# Altium PCB PCB1.PcbDoc
Units mm, origin at the board's own origin, x right, y up, seen from the top; angles counter-clockwise.
Board outline 73.66 x 122.05 mm, 2 copper layers (Top Layer, Bottom Layer); 28 components, 32 nets, 121 pads, 0 vias.
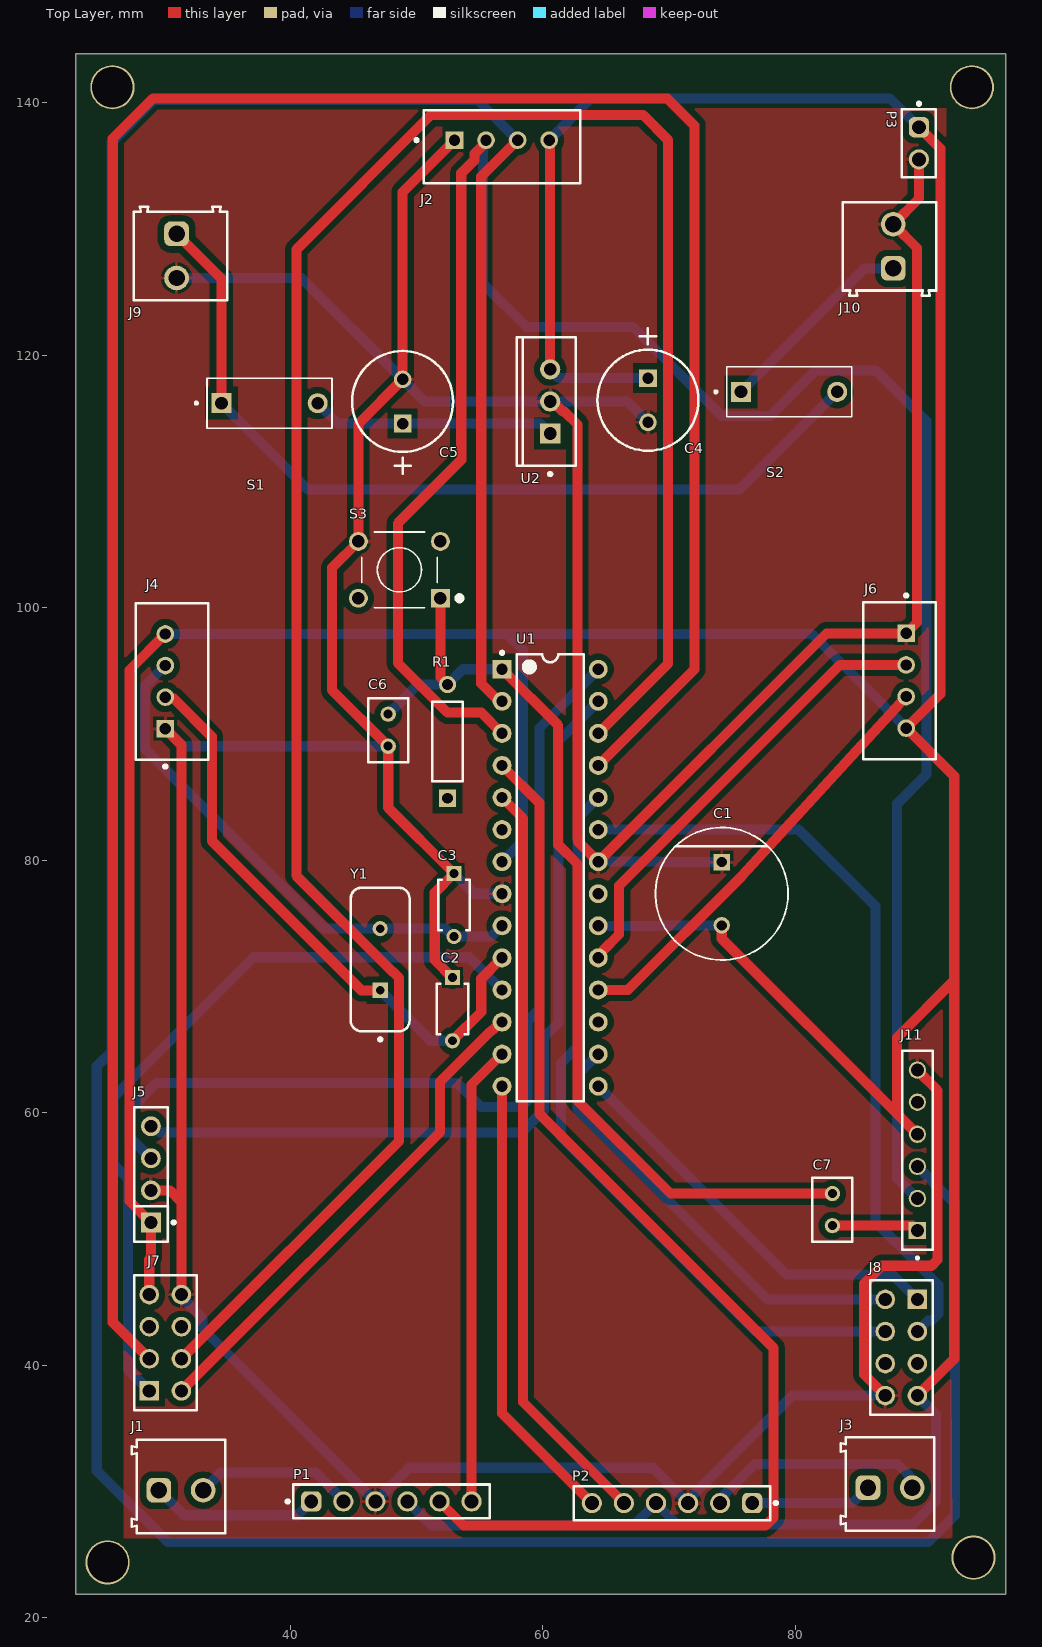
[diagram p0: Top Layer view]
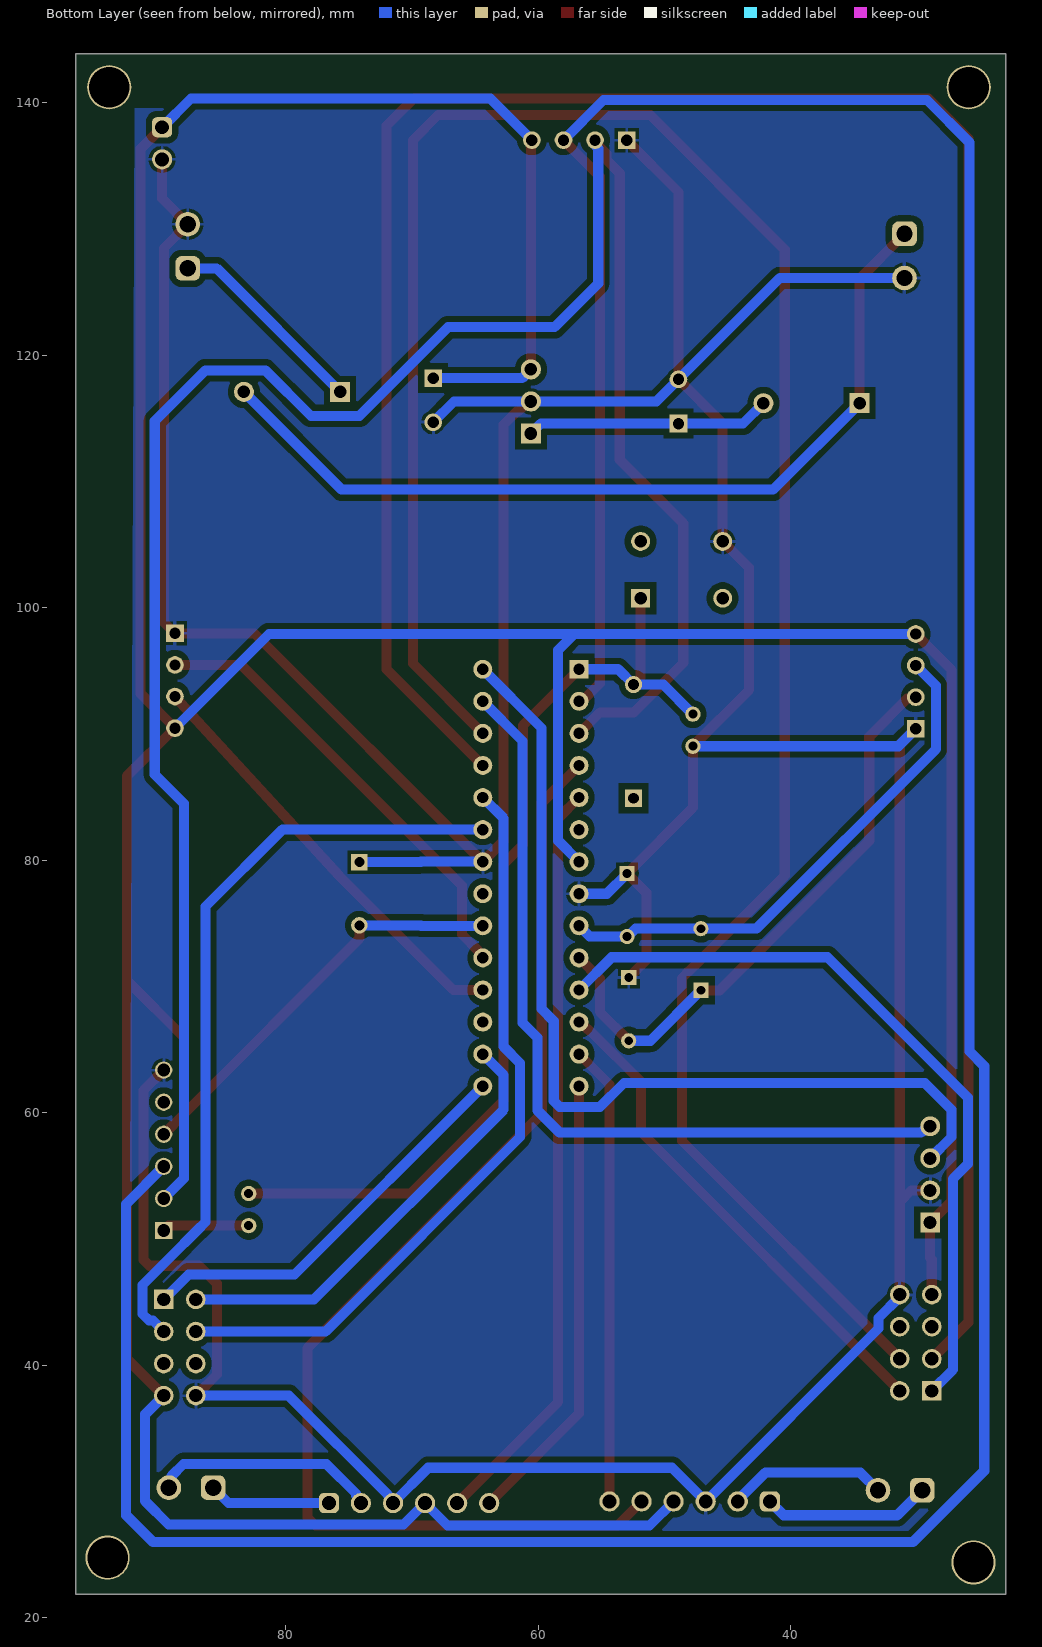
[diagram p1: Bottom Layer view, seen from below]
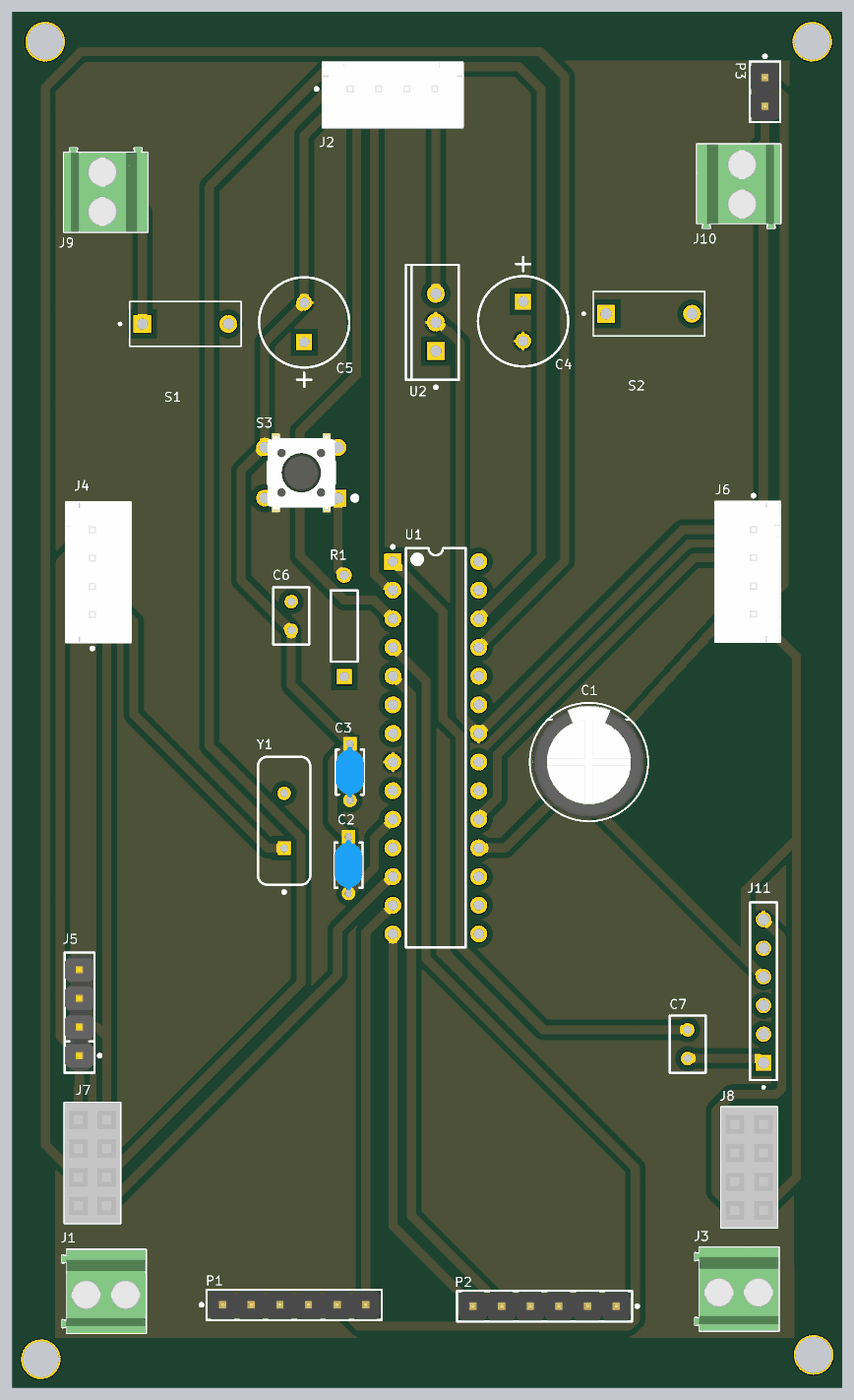
[diagram p2: 3D render of the assembled board from above, using the file's embedded part models]

## Layer stack, top to bottom
Top Solder: solder mask 0.0102, Solder Resist, Dk 3.5
Top Layer: signal copper 0.0356
Dielectric 1: dielectric 0.32, FR-4, Dk 4.8
Bottom Layer: signal copper 0.0356
Bottom Solder: solder mask 0.0102, Solder Resist, Dk 3.5

## Board outline
22.987,21.844 96.647,21.844 96.647,143.891 22.987,143.891

## Design rules (kind name [scope] priority, off if disabled: settings)
Clearance [All] p1: gap=0.5 ignorepadtopadclearanceinfootprint=FALSE
PolygonConnect [All] p1: connectstyle=Relief reliefconductorwidth=0.254 reliefentries=4 polygonreliefangle="90 Angle" airgapwidth=0.254
RoutingVias [All] p1: holewidth=0.711 width=1.27 viastyle="Through Hole" minholewidth=0.711 minwidth=1.27 maxholewidth=0.711 maxwidth=1.27
SolderMaskExpansion [All] p1: expansion=0.102 istentingtop=FALSE
Width [All] p1: maxlimit=1 minlimit=0.8 preferedwidth=0.8
30 further rules are at their usual default settings.

## Components (designator, comment, footprint, x,y, rotation, side; value= is the part's Value field where it differs from the comment)
C1 "EEUED2G100" FP-RAD-TH-D_10_0_5-L_20_2-MFG 74.168,77.343 r270 top
C2 "RDE5C2A220J0M1H03A" FP-RDE0M1-MFG 52.832,68.199 r270 top
C3 "RDE5C2A220J0M1H03A" FP-RDE0M1-MFG 52.959,76.454 r270 top
C4 "ECA-2AM470" CAPPR65-350-1150X800X1250 68.326,116.431 r270 top
C5 "ECA-2AM470" CAPPR65-350-1150X800X1250 48.895,116.332 r90 top
C6 "C320C104M5U5TA" C320C 40.752,97.297 r90 top value=100nF
C7 "C320C104M5U5TA" C320C 75.931,59.324 r90 top value=100nF
J1 "691214110002" 691214110002 31.341,30.399 r0 top
J2 "Ultrasonic 1" FP-B4B-XH-A_LF_SN-MFG 56.749,136.508 r180 top
J3 "691214110002" 691214110002 87.503,30.607 r0 top
J4 "Ultrasonic 2" FP-B4B-XH-A_LF_SN-MFG 30.624,94.167 r270 top
J5 "MPU6050" FP-M20-9990445-MFG 28.956,55.118 r90 top
J6 "Ultrasonic 3" FP-B4B-XH-A_LF_SN-MFG 88.248,94.214 r90 top
J7 "Motor Driver 1" SMTC-SSW-104-02-X-D 28.829,37.973 r90 top
J8 "Motor Driver 2" SMTC-SSW-104-02-X-D 89.662,45.212 r270 top
J9 "691214110002" 691214110002 31.288,127.861 r270 top
J10 "691214110002" 691214110002 87.457,128.623 r90 top
J11 "ESQ-106-59-G-S" SAMTEC_ESQ-106-59-G-S 89.662,50.673 r90 top
P1 "Motor 1" 61300611121 48.006,29.21 r0 top
P2 "Motor 2" 61300611121 70.231,29.083 r180 top
P3 "61300211121" 61300211121 89.789,136.779 r270 top
R1 "MFR-25FBF52-1K" RESA60-630X240 52.451,89.408 r90 top
S1 "DS01-254-L-01BE" SW_DS01-254-L-01BE 38.354,116.2 r270 top
S2 "DS01-254-L-01BE" SW_DS01-254-L-01BE 79.502,117.094 r270 top
S3 "FSM8JH" SW_FSM8JH 48.641,102.997 r180 top
U1 "ATmega328P-PU" 28P3 60.579,78.613 r0 top
U2 "LM7805ACT" FAIR-TO-220-3 60.579,116.332 r180 top
Y1 "FOXSLF/160-20" FOX-FOXSLF160-20 47.117,72.136 r90 top

## Footprints (in the part's own frame and the unit in brackets; to place one, negate y for a bottom-side part, rotate by r counter-clockwise, add the part's x,y. Pads: shape width x height; smd on the part's side, far side on the other; paste and mask are expansions set on the pad)
28P3 [mm] "28-Pin Plastic Dual In-Line Package (PDIP)"
  rect 1.5x1.5 hole 0.9: 1(-3.81,16.51)
  round 1.5 hole 0.9: 2(-3.81,13.97) 3(-3.81,11.43) 4(-3.81,8.89) 5(-3.81,6.35) 6(-3.81,3.81) 7(-3.81,1.27) 8(-3.81,-1.27) 9(-3.81,-3.81) 10(-3.81,-6.35) 11(-3.81,-8.89) 12(-3.81,-11.43) 13(-3.81,-13.97) 14(-3.81,-16.51) 15(3.81,-16.51) 16(3.81,-13.97) 17(3.81,-11.43) 18(3.81,-8.89) 19(3.81,-6.35) 20(3.81,-3.81) 21(3.81,-1.27) 22(3.81,1.27) 23(3.81,3.81) 24(3.81,6.35) 25(3.81,8.89) 26(3.81,11.43) 27(3.81,13.97) 28(3.81,16.51)
  silkscreen extent -3.93,-17.7 2.65,17.93, body extent -3.6,-17.65 3.6,17.65, height 4.58
61300211121 [mm] "Pin Header, pitch 2.54 mm, THT, Vertical, single row, 2p"
  rrect50% 1.6x1.6 hole 1.1: 1(-1.27,0)
  round 1.6 hole 1.1: 2(1.27,0)
  silkscreen extent -3.26,-1.34 2.69,1.34, body extent -2.54,-1.27 2.54,1.27, height 8.57
61300611121 [mm] "Pin Header, pitch 2.54 mm, THT, Vertical, single row, 6p"
  rrect50% 1.6x1.6 hole 1.1: 1(-6.35,0)
  round 1.6 hole 1.1: 2(-3.81,0) 3(-1.27,0) 4(1.27,0) 5(3.81,0) 6(6.35,0)
  silkscreen extent -8.34,-1.34 7.77,1.34, body extent -7.62,-1.27 7.62,1.27, height 8.57
691214110002 [mm] "3.50 mm Horizontal Entry Modular, 2p"
  rrect50% 1.95x1.95 hole 1.3: 1(-1.75,-0.3)
  round 1.95 hole 1.3: 2(1.75,-0.3)
  silkscreen extent -3.9,-3.7 3.5,3.7, body extent -3.95,-3.7 3.5,3.7, height 8.55
C320C [mm]
  round 1.21 hole 0.71: 1(-8.27,-7) 2(-5.73,-7)
  silkscreen extent -9.54,-8.59 -4.46,-5.41
CAPPR65-350-1150X800X1250 [mm] "THD, 2-Leads, Dia 8mm, Body 11.5mm"
  rect 1.4x1.4 hole 0.9: 1(-1.75,0)
  round 1.4 hole 0.9: 2(1.75,0)
  silkscreen extent -5.71,-4 4,4, body extent -4,-4 4,4, height 12.5
FAIR-TO-220-3 [mm] "FM, 3-Leads, Body 10.2x4.7mm, Pitch 2.54mm"
  rect 1.6x1.6 hole 1: 1(0,2.54)
  round 1.6 hole 1: 2(0,0) 3(0,-2.54)
  silkscreen extent -2.04,-5.1 2.66,5.87, body extent -2.04,-5.1 2.66,5.1, height 18.95
FOX-FOXSLF160-20 [mm] "THD, 2-Leads, Body 11.35x4.65mm"
  rect 1.2x1.2 hole 0.7: 1(-2.44,0)
  round 1.2 hole 0.7: 2(2.44,0)
  silkscreen extent -6.45,-2.33 5.68,2.33, body extent -5.67,-2.32 5.68,2.33, height 3.6
FP-B4B-XH-A_LF_SN-MFG [mm]
  rect 1.4x1.4 hole 0.9 paste-2539.97 mask+0: 1(3.75,-0.525)
  round 1.4 hole 0.9 paste-2539.97 mask+0: 2(1.25,-0.525) 3(-1.25,-0.525) 4(-3.75,-0.525)
  silkscreen extent -6.2,-2.88 6.87,2.87, body extent -6.3,-2.98 6.3,2.98, height 0.25
FP-M20-9990445-MFG [mm]
  rect 1.57x1.57 hole 1.02 paste-2539.97 mask+0: 1(-3.81,0)
  round 1.57 hole 1.02 paste-2539.97 mask+0: 2(-1.27,0) 3(1.27,0) 4(3.81,0)
  silkscreen extent -5.33,-1.92 5.33,1.32, body extent -5.43,-1.42 5.43,1.42, height 0.25
FP-RAD-TH-D_10_0_5-L_20_2-MFG [mm]
  rect 1.3x1.3 hole 0.8 paste-2539.97 mask+0: 1(-2.5,0)
  round 1.3 hole 0.8 paste-2539.97 mask+0: 2(2.5,0)
  silkscreen extent -5.25,-5.25 5.25,5.25, body extent -5.35,-5.35 5.35,5.35, height 0.25
FP-RDE0M1-MFG [mm]
  rect 1.2x1.2 hole 0.7 paste-2539.97 mask+0: 1(-2.5,0)
  round 1.2 hole 0.7 paste-2539.97 mask+0: 2(2.5,0)
  silkscreen extent -2,-1.25 2,1.25, body extent -3.2,-1.35 3.2,1.35, height 0.25
RESA60-630X240 [mm] "Axial Resistor, 2-Leads, Dia 2.4mm, Body Length 6.3mm"
  rect 1.35x1.35 hole 0.85: 1(-4.5,0)
  round 1.35 hole 0.85: 2(4.5,0)
  silkscreen extent -3.15,-1.2 3.15,1.2, body extent -3.15,-1.2 3.15,1.2, height 2.4
SAMTEC_ESQ-106-59-G-S [mm]
  rect 1.37x1.37 hole 1.02: 01(0,0)
  round 1.37 hole 1.02: 02(2.54,0) 03(5.08,0) 04(7.62,0) 05(10.16,0) 06(12.7,0)
  silkscreen extent -2.27,-1.2 14.23,1.2
SMTC-SSW-104-02-X-D [mm] "SQ Post Socket, 2x4 Pins, Vertical, 2.54mm Pitch, Female"
  rect 1.55x1.55 hole 1.04: 1(0,0)
  round 1.55 hole 1.04: 2(0,-2.54) 3(2.54,0) 4(2.54,-2.54) 5(5.08,0) 6(5.08,-2.54) 7(7.62,0) 8(7.62,-2.54)
  silkscreen extent -1.53,-3.74 9.15,1.2, body extent -1.52,-3.75 9.14,1.21, height 8.51
SW_DS01-254-L-01BE [mm]
  rect 1.58x1.58 / inner round 1.58 / far side rect 1.58x1.58 hole 1: 1A(0,-3.81)
  round 1.58 hole 1: 1B(0,3.81)
  silkscreen extent -1.98,-5.9 1.98,4.95
SW_FSM8JH [mm]
  rect 1.498x1.498 / inner round 1.498 / far side rect 1.498x1.498 hole 0.99: 1(-3.25,2.25)
  round 1.498 hole 0.99: 2(-3.25,-2.25) 3(3.25,2.25) 4(3.25,-2.25)
  silkscreen extent -4.95,-3 3,3, body extent -3,-3.95 3,3.95, height 9.5

## Part data
C1: library part CMP-05427-001613-1, "Aluminum Electrolytic Capacitors (Radial Lead Type) 10uF ±20% 400V", Capacitance=10uF, Case/Package=Radial, Dielectric Material=Aluminium, Max Operating Temperature=105°C, Min Operating Temperature=-25°C, Package Quantity=200, Ripple Current=300mA, Tolerance=20%, Voltage=400V, Construction=RADIAL, Contact Plating=Tin, Diameter=10mm, Dissipation Factor=0.24%, Height=20mm, Height - Seated (Max)=0.787inch, Lead Diameter=0.6mm, Lead Free="Lead Free", Lead Pitch=5mm, Length=20mm, Life (Hours)=8000Hour, Mount="Through Hole", Number of Pins=2, Packaging=Bulk, Polarity=Polar, Radiation Hardening=No, REACH SVHC="No SVHC", Ripple Current (AC)=300mA, RoHS Compliant=Yes, Series=ED, Termination=Radial, Voltage Rating=400V, Voltage Rating (DC)=400V
C2 C3: library part CMP-06035-022985-1, "Ceramic Capacitor 22pF ±5% 100V C0G Radial", Capacitance=22pF, Case/Package=Radial, Dielectric=C0G, Max Operating Temperature=125°C, Min Operating Temperature=-55°C, Package Quantity=1, Resistor Type=Ceramic, Tolerance=5%, Voltage Rating=100V, Height=3.5mm, Height - Seated (Max)=0.236inch, Lead Diameter=0.5mm, Lead Free="Lead Free", Lead Pitch=0.197inch, Length=0.157inch, Mount="Through Hole", Packaging="Cut Tape", Termination=Radial, Voltage Rating (DC)=100V, Width=0.098inch
C4 C5: library part CMP-1665-00041-1, "Aluminum Electrolytic Capacitor, 47 uF, +/- 20%, 100 V, -40 to 85 degC, 2-Pin THD, RoHS, Bulk", Case\Package=QFN, Max Operating Temperature="70 degC", Min Operating Temperature="-20 degC", Nominal Supply Voltage="3.3 V", Package Quantity=500, ComponentLink1Description="Manufacturer URL", ComponentLink1URL=http://www.panasonic.com/, ComponentLink2Description=Datasheet, ComponentLink2URL=http://industrial.panasonic.com/cdbs/www-data/pdf/RDF0000/ABA0000C1047.pdf, Data Rate="54 mbps", DatasheetVersion=Mar-16, Length="7.7 mm", Mount="Surface Mount", PackageDescription="2-Pin Radial Lead, Dia 8 mm, Body Length 11.5 mm", PackageReference=CAPPR65-350-1150X800X1250, Packaging="Tape and Reel", Pins=48, Radiation Hardening=No, RoHSCompliant=true
C6 C7: "0.1ÂµF Â±20% 50V Ceramic Capacitor Z5U Radial", Package="Radial KEMET", Availability=Unavailable, MF=KEMET, MP=C320C104M5U5TA, Price=None, SnapEDA_Link=https://www.snapeda.com/parts/C320C104M5U5TA/KEMET/view-part/228184/?ref=snap
J1 J3 J9 J10: library part CMP-1502-02464-2, Color="Blue, Green", Current=10A, Max Operating Temperature=105°C, Min Operating Temperature=-40°C, Voltage=300V, Contact Material=Brass, Contact Plating="Brass, Tin", Current Rating=10A, Height=8.7mm, Housing Material=Nylon, Lead Pitch=3.5mm, Length=7.4mm, Mount="Through Hole", NexarPartId=18818288, Number of Contacts=2, Number of Levels=1, Number of Pins=2, Number of Positions Per Level=2, Number of Rows=1, Packaging=Box, Pitch=3.5052mm, Plating="Brass, Steel", REACH SVHC=Unknown, RoHS=Compliant, Stripping Length=-6mm, Termination=Screw, Voltage Rating=300V, Width=7.9mm, Wire Gauge (Max)=24AWG, Wire Gauge (Min)=16AWG, Wire/Cable Gauge=24AWG
J2 J4 J6: library part CMP-17439-000250-1, "CONN HEADER VERT 4POS 2.5MM", Color=Natural, Contact Resistance=20mR, Current Rating=3A, Flammability Rating="UL94 V-0", Housing Color=White, Insulation Resistance=1GR, Max Operating Temperature=85°C, Max Voltage Rating (AC)=250V, Min Operating Temperature=-25°C, Package Quantity=500, Connector Type=Header, Contact Finish - Mating=TIN, Contact Material=Brass, Contact Plating=Tin, Contact Shape=Square, Contact Type="Male Pin", Depth=5.75mm, Fastening Type=Detent, Gender=Male, Housing Material=Polyamide, Insulation Color=Natural, Insulation Material=Nylon, Lead Free="Lead Free", Lead Pitch=2.5mm, Length=12.4mm, Mated Stacking Heights=9.8mm, Material=Polyamide, Max Current Rating=3A, Max Voltage Rating (DC)=250V, Mount="Through Hole", Number of Contacts=4, Number of Positions=4, Number of Rows=1, Orientation=Straight, Packaging=Bulk, Pitch=2.5mm, REACH SVHC="No SVHC", Series=XH, Termination=Solder, Voltage Rating=250V, Voltage Rating (AC)=250V, Wire/Cable Gauge=22AWG
J5: library part CMP-00671-05399696-1, "M20-9990445 Conn Unshrouded Header HDR 4 POS 2.54mm Solder ST Thru-Hole Bulk/Loose", Case/Package=SIL, Color=Black, Contact Resistance=25mΩ, Current Rating=3A, Insulation Resistance=10GΩ, Max Operating Temperature=105°C, Min Operating Temperature=-40°C, Voltage Rating (AC)=750V, Connector Type="Male Pin", Contact Material="Brass, Bronze, Gold, Nickel", Contact Mating Length=6.096mm, Contact Plating=Gold, Depth=2.54mm, Gender=Male, Height=2.54mm, Housing Color=Black, Housing Material=Nylon, Lead Pitch=2.54mm, Length=10.16mm, Max Current Rating=3A, Mount="Through Hole", NexarPartId=5399696, Number of Contacts=4, Number of Pins=4, Number of Positions=4, Number of Rows=1, Orientation=Straight, Pitch=2.54mm, Radiation Hardening=No, REACH SVHC="No SVHC", RoHS=Compliant, Termination=Solder, Voltage Rating (DC)=750V, Weight=45.359237g, Width=12.7mm
J7 J8: library part CMP-1023-00343-1, "SQ Post Socket, Through-hole, Vertical, -55 to 125 degC, 2.54mm Pitch, 8-Pin, Female, RoHS", Manufacturer=Samtec, PartNumber=SSW-104-02-G-D, Temperature Range="-55 to 125 degC", ComponentLink1Description="Manufacturer URL", ComponentLink1URL=http://www.samtec.com, ComponentLink2Description=Datasheet, ComponentLink2URL=http://www.samtec.com/documents/webfiles/pdf/SSW_TH.PDF, ComponentLink3Description="Package Specification", ComponentLink3URL=http://www.samtec.com/documents/webfiles/cpdf/SSW-1XX-XX-XXX-X-XX-XXX-XX-MKT.pdf, DatasheetVersion=F-214, Mounting Technology=Through-hole, Orientation=Vertical, PackageDescription="Assembly, Socket Strip .016 X .031 Tail", PackageReference=SSW-104-02-X-D, PackageVersion="CA, 6/1987", Pitch="2.54 mm", RoHS=True
J11: Package=None, Availability=Unavailable, MP=ESQ-106-59-G-S, Price=None
P1 P2: library part CMP-1502-01070-3, Color=Black, Contact Resistance=20mΩ, Current Rating=3A, Max Operating Temperature=105°C, Min Operating Temperature=-40°C, Operating Supply Voltage=250V, Connector Type="Male Pin", Contact Gender=Male, Contact Material=Copper, Contact Mating Length=5.9944mm, Contact Plating=Gold, Gender=Male, Height=8.89mm, Housing Material=PBT, Lead Free="Lead Free", Lead Pitch=2.54mm, Mount="Through Hole", NexarPartId=20084590, Number of Contacts=6, Number of Pins=6, Number of Positions=6, Number of Rows=1, Orientation=Vertical, Packaging=Bulk, Pitch=2.54mm, REACH SVHC=Unknown, RoHS=Compliant, Termination="Through Hole", Voltage Rating=250V
P3: library part CMP-1712-00002-6, Color=Black, Contact Resistance=20mΩ, Current Rating=3A, Max Operating Temperature=125°C, Min Operating Temperature=-40°C, Operating Supply Voltage=250V, Connector Type="Male Pin", Contact Gender=Male, Contact Material=Copper, Contact Mating Length=5.9944mm, Contact Plating=Gold, Gender=Male, Height=8.94mm, Housing Material=PBT, Lead Free="Lead Free", Lead Pitch=2.54mm, Mount="Through Hole", NexarPartId=20081794, Number of Contacts=2, Number of Pins=2, Number of Positions=2, Number of Rows=1, Orientation=Vertical, Packaging=Bulk, Pitch=2.54mm, REACH SVHC="No SVHC", RoHS=Compliant, Termination="Through Hole", Voltage Rating=250V
R1: library part CMP-1659-00075-1, "Axial Resistor, 1 KOhm, +/- 1%, 250 mW, -55 to 155 degC, 2-Pin THD, RoHS, Bulk", Case\Package=Axial, Max Operating Temperature="155 degC", Min Operating Temperature="-55 degC", Package Quantity=200, Power Rating="250 mW", Resistance="10 kohm", Tolerance=1%, Voltage Rating="250 V", ComponentLink1Description="Manufacturer URL", ComponentLink1URL=http://www.yageo.com/, ComponentLink2Description=Datasheet, ComponentLink2URL=http://www.yageo.com/documents/recent/Yageo%20LR_MFR_2013.pdf, DatasheetVersion=Apr-13, Length="0.248 inch", PackageDescription="2-Pin Axial Lead, Dia 2.4 mm, Body Length 6.3 mm", PackageReference=MFR-25, Packaging=Bulk, RoHSCompliant=true
S1 S2: "1 Position, Through Hole, 2.54 mm Pitch, Raised Slide Actuator, Flat Bottom, Long Pin, DIP Switch", Package=None, Availability="In Stock", Check_prices=https://www.snapeda.com/parts/DS01-254-L-01BE/CUI+Devices/view-part/?ref=eda, CUI_purchase_URL=https://www.cuidevices.com/product/switches/dip-switches/ds01-254-series?utm_source=snapeda.com&utm_medium=referral&utm_campaign=snapedaBOM, MF="CUI Devices", MP=DS01-254-L-01BE, Price=None, Purchase-URL=https://pricing.snapeda.com/search/part/DS01-254-L-01BE/?ref=eda, SnapEDA_Link=https://www.snapeda.com/parts/DS01-254-L-01BE/CUI+Devices/view-part/?ref=snap
S3: "Tactile Switch SPST-NO Top Actuated Through Hole", Package=None, Availability="In Stock", Check_prices=https://www.snapeda.com/parts/FSM8JH/TE+Connectivity+ALCOSWITCH+Switches/view-part/?ref=eda, MF="TE Connectivity", MP=FSM8JH, Price=None, SnapEDA_Link=https://www.snapeda.com/parts/FSM8JH/TE+Connectivity+ALCOSWITCH+Switches/view-part/?ref=snap
U1: library part CMP-0095-00013-2, "8-bit AVR Microcontroller, 32KB Flash, 1KB EEPROM, 2KB SRAM, 28-pin PDIP, Industrial Grade (-40°C to 85°C)", ComponentLink1Description="Manufacturer URL", ComponentLink1URL=http://www.atmel.com/, ComponentLink2Description="ATmega48A/48PA/88A/88PA/168A/168PA/328/328P Datasheet", ComponentLink2URL=http://www.atmel.com/dyn/resources/prod_documents/8271.pdf, ComponentLink3Description="ATmega48A/48PA/88A/88PA/168A/168PA/328/328P Summary", ComponentLink3URL=http://www.atmel.com/dyn/resources/prod_documents/8271S.pdf, DatasheetVersion="revD, May-2011", PackageDescription="28-lead (0.300\"/7.62mm Wide) Plastic Dual Inline Package (PDIP)", PackageReference=28P3, PackageVersion="revB, Sep-2001", RevisionNote="DatasheetVersion updated. URLs added."
U2: library part CMP-2000-04937-1, "Positive Voltage Regulator, 5 V, 1 A, 0 to 125 degC, 3-Pin TO-220, RoHS, Tube", Dropout Voltage Measurement Current=1A, Manufacturer=Fairchild, Maximum Input Voltage=35V, Maximum Operating Temperature=+125degC, Minimum Operating Temperature=0degC, Output Voltage=5V, Package Description="3-Pin Through Hole Device, Body 10 x 4.5 mm, Pitch 2.54 mm", Package Reference=TO-220, Quiescent Current=6mA, Typical Dropout Voltage @ Current=2V@1A, Datasheet URL=https://datasheet.ciiva.com/5816/1359194-5816420.pdf, Datasheet Version="Rev. 1.0.1, 05/2006", Dimensions=10.67x4.83x16.51mm, Height=16.51mm, Length=10.67mm, Line Regulation=50mV, Load Regulation=100mV, Manufacturer URL=https://www.fairchildsemi.com/, Maximum Output Current=1A, Mounting Type=ThroughHole, Number of Outputs=1, Output Type=Fixed, Package Type=TO-220, Package URL=https://www.fairchildsemi.com/package-drawings/TO/TO220B03.pdf, Pin Count=3, Polarity=Positive, Regulator Function=Linear, Series=LM78xx, Width=4.83mm
Y1: library part CMP-1749-00003-1, "Resistance Weld Thru-Hole Crystal, 16 MHz, -20 to 70 degC, 2-Pin THD, RoHS, Bulk", Case\Package=Axial, Max Operating Temperature="155 degC", Min Operating Temperature="-55 degC", Package Quantity=200, Power Rating="250 mW", Resistance="221 kohm", Tolerance=1%, Voltage Rating="250 V", ComponentLink1Description="Manufacturer URL", ComponentLink1URL=http://www.foxonline.com/, ComponentLink2Description=Datasheet, ComponentLink2URL=http://www.foxonline.com/pdfs/hc49slf.pdf, DatasheetVersion=Mar-15, Length="0.248 inch", Mount="Through Hole", PackageDescription="2-Pin Through Hole Device, Body 11.35 x 4.65 mm", PackageReference=FOXSLF160-20, Packaging=Bulk, RoHSCompliant=true

## Free pads (board coordinates)
  round 3.5 hole 3.2: 9(25.527,24.384) 9(25.908,141.224) 9(93.98,141.224) 9(94.107,24.765)

## Nets (pads, with @x,y where several pads share a name; then routed paths per layer and width w, separated by ;. In a path a pad name is that pad's centre, name@x,y a point inside that pad or via, vN(x,y) a via of type N, cw(c..) or ccw(c..) an arc to the next point about the centre after c; other vN are vias at no path point)
12V: J9.1 S1.1A S2.1B | length 69.7
  Top Layer w0.8: J9.1 34.544,126.055 S1.1A
  Bottom Layer w0.8: S1.1A 41.397,109.347 75.565,109.347 S2.1B
+5: R1.1
+5V: C1.2 C4.1 J2.4 J4.4 J5.1 J6.4 J7.7 J8.7 J11.04 P1.4 P2.4 P3.1 U1.7 U1.20 U2.3 | length 397.2
  Top Layer w0.8: J7.7 28.829,48.387 28.956,48.514 J5.1 27.254,53.01 27.254,95.072 J4.4 ; J2.4 60.579,136.953 U2.3 ; C1.2 74.168,73.787 88.062,59.893 ; J8.7 92.583,40.513 92.583,70.485 ; J11.04 88.062,59.893 ; P3.1 91.491,136.347 91.491,93.182 J6.4 92.583,86.654 92.583,70.485 ; 88.062,59.893 88.062,65.964 92.583,70.485
  Bottom Layer w0.8: J4.4 57.15,97.917 ; P1.4 51.181,27.305 67.183,27.305 P2.4 70.663,27.381 89.281,27.381 91.135,29.235 91.135,36.119 J8.7 ; U1.7 58.42,81.534 58.42,96.647 57.15,97.917 ; J2.4 63.801,140.335 87.503,140.335 P3.1 ; U2.3 61.27,118.181 C4.1 ; U1.20 69.266,74.803 69.306,74.843 C1.2 ; J6.4 81.32,97.917 57.15,97.917
Echo1: J2.3 J11.03 U1.2 | length 287.1
  Top Layer w0.8: U1.2 56.58,92.583 56.23,92.933 56.186,92.933 55.118,94.001 55.118,134.152 J2.3
  Bottom Layer w0.8: J2.3 54.824,140.208 29.21,140.208 25.832,136.83 25.832,64.844 24.671,63.683 24.671,31.641 30.328,25.984 90.5,25.984 92.637,28.121 92.637,52.778 J11.03
Echo2: C3.2 J4.3 U1.9 Y1.2 | length 42.1
  Bottom Layer w0.8: J4.3 28.499,93.817 28.499,88.798 42.721,74.576 52.29,74.576 52.912,73.954 55.92,73.954 U1.9
Echo3: J6.3 U1.18 | length 34.4
  Top Layer w0.8: U1.18 66.726,69.723 75.743,78.74 J6.3
ENC_A_M1: P1.5 U1.4 | length 96
  Top Layer w0.8: P1.5 53.721,27.305 77.648,27.305 78.283,27.94 78.283,41.351 59.72,59.914 59.72,84.552 U1.4
ENC_A_M2: P2.5 U1.5 | length 59.9
  Top Layer w0.8: U1.5 58.42,83.312 58.42,37.084 P2.5
ENC_B_M1: P1.6 U1.13 | length 36.4
  Top Layer w0.8: P1.6 54.356,62.23 U1.13
ENC_B_M2: P2.6 U1.14 | length 36
  Top Layer w0.8: U1.14 56.769,36.195 P2.6
GND: C1.1 C2.1 C3.1 C4.2 C5.2 C6.1 J2.1 J4.1 J5.2 J6.1 J7.8 J8.8 J9.2 J10.2 J11.06 P1.3 P2.3 P3.2 S3.4 U1.8 U1.22 U2.2 | length 408.8
  Top Layer w0.8: J5.2 30.48,53.848 31.369,52.959 ; J4.1 31.369,89.147 31.369,52.959 ; J7.8 31.369,52.959 ; C2.1 51.435,72.096 51.435,77.43 C3.1 47.752,84.161 C6.1 43.307,93.472 43.307,103.163 S3.4 45.391,114.578 C5.2 48.895,132.929 J2.1 ; U2.2 60.795,116.332 61.599,115.529 61.715,115.529 62.739,114.505 62.739,81.74 62.773,81.706 62.773,81.499 U1.22 82.47,97.964 J6.1 89.637,98.828 89.637,128.493 J10.2 89.789,132.405 P3.2 ; J8.8 85.446,39.268 85.446,46.457 86.868,47.879 90.794,47.879 91.262,48.348 91.262,61.773 J11.06
  Bottom Layer w0.8: J4.1 31.489,89.027 C6.1 ; J9.2 40.866,126.111 C5.2 50.645,116.332 U2.2 66.675,116.332 C4.2 ; J7.8 31.369,45.422 33.044,43.747 33.044,42.902 P1.3 49.403,31.877 68.707,31.877 P2.3 71.501,29.299 71.901,29.699 71.901,29.737 79.756,37.592 J8.8 ; C3.1 54.57,77.343 U1.8 ; U1.22 69.266,79.883 69.306,79.843 C1.1
L_EN_D1: J7.4 U1.26 | length 182.4
  Top Layer w0.8: J7.4 48.617,57.761 48.617,70.669 48.09,71.196 48.057,71.196 40.474,78.779 40.474,128.358 51.13,139.014 67.945,139.014 69.926,137.033 69.926,95.58 U1.26
L_EN_D2: J8.4 U1.24 | length 60.2
  Bottom Layer w0.8: U1.24 62.738,83.312 62.738,65.229 61.438,63.929 61.438,58.069 76.835,42.672 J8.4
L_PWM_D1: J7.2 U1.12 | length 39.8
  Top Layer w0.8: J7.2 51.867,58.471 51.867,62.468 55.718,66.319 U1.12
L_PWM_D2: J8.2 U1.16 | length 35.7
  Bottom Layer w0.8: U1.16 62.738,62.992 62.738,60.243 77.769,45.212 J8.2
NetC5_1: C5.1 S1.1B U2.1 | length 19.4
  Bottom Layer w0.8: S1.1B 43.782,114.582 59.789,114.582 U2.1
NetC7_1: C7.1 J11.01 | length 6.9
  Top Layer w0.8: C7.1 89.281,51.054 J11.01
NetJ1_1: J1.1 P1.1 | length 13.3
  Bottom Layer w0.8: J1.1 31.572,28.118 40.564,28.118 P1.1
NetJ1_2: J1.2 P1.2 | length 12.7
  Bottom Layer w0.8: J1.2 34.488,31.496 42.009,31.496 44.196,29.309 P1.2
NetJ3_1: J3.1 P2.1 | length 9.7
  Bottom Layer w0.8: P2.1 84.529,29.083 J3.1
NetJ3_2: J3.2 P2.2 | length 17.9
  Bottom Layer w0.8: P2.2 74.041,29.299 74.441,29.699 74.441,29.838 76.785,32.182 88.087,32.182 89.033,31.236 89.033,30.527 J3.2
NetJ10_1: J10.1 S2.1A | length 16.1
  Bottom Layer w0.8: S2.1A 85.471,126.873 J10.1
R_EN_D1: J7.3 U1.25 | length 200
  Top Layer w0.8: J7.3 25.933,43.409 25.933,137.16 29.108,140.335 69.85,140.335 72.009,138.176 72.009,95.123 U1.25
R_EN_D2: J8.3 U1.23 | length 61.1
  Bottom Layer w0.8: U1.23 80.264,82.423 86.36,76.327 86.36,51.337 86.995,50.702 86.995,50.697 89.164,48.528 89.168,48.528 91.337,46.36 91.337,44.064 90.81,43.537 90.506,43.537 89.662,42.693 J8.3
R_PWM_D1: J7.1 U1.11 | length 60.9
  Bottom Layer w0.8: J7.1 27.153,39.649 27.153,54.761 25.971,55.943 25.971,61.201 37.083,72.314 54.178,72.314 U1.11
R_PWM_D2: J8.1 U1.15 | length 32.3
  Bottom Layer w0.8: U1.15 79.299,47.193 87.681,47.193 J8.1
rst: C6.2 C7.2 R1.2 S3.1 U1.1 | length 77.4
  Top Layer w0.8: S3.1 51.891,94.468 R1.2 ; U1.1 61.214,90.678 61.214,81.22 62.739,79.695 62.739,60.959 70.104,53.594 C7.2
  Bottom Layer w0.8: C6.2 50.093,93.908 R1.2 53.666,95.123 U1.1
SCL: J5.3 U1.28 | length 74.4
  Bottom Layer w0.8: J5.3 27.271,58.073 27.271,60.24 29.388,62.357 53.213,62.357 55.118,60.452 58.302,60.452 58.771,60.921 58.771,67.255 59.741,68.224 59.741,90.475 U1.28
SDA: J5.4 U1.27 | length 66.2
  Bottom Layer w0.8: J5.4 29.164,58.928 29.672,58.42 58.293,58.42 60.071,60.198 60.071,65.955 61.239,67.123 61.239,89.433 U1.27
Trig1: J2.2 J11.02 U1.3 | length 172.2
  Top Layer w0.8: J2.2 55.499,136.871 54.599,135.971 54.599,135.471 53.54,134.412 53.54,111.706 48.514,106.68 48.514,95.618 52.438,91.694 55.118,91.694 U1.3
  Bottom Layer w0.8: J2.2 55.384,136.918 55.384,136.494 55.245,136.355 55.245,125.679 58.699,122.225 67.132,122.225 74.168,115.189 78.003,115.189 81.61,118.796 86.36,118.796 90.373,114.783 90.373,86.792 88.062,84.48 88.062,54.813 J11.02
Trig2: C2.2 J4.2 U1.10 Y1.1 | length 47
  Top Layer w0.8: J4.2 30.214,92.802 30.769,92.802 33.782,89.789 33.782,81.534 45.62,69.696 Y1.1 ; C2.2 55.118,67.985 55.118,70.612 U1.10
  Bottom Layer w0.8: Y1.1 51.114,65.699 C2.2
Trig3: J6.2 U1.19 | length 36.4
  Top Layer w0.8: U1.19 64.389,72.452 64.739,72.802 64.739,72.82 66.039,74.12 66.039,77.977 83.526,95.464 J6.2
pads on no net: J7.5 J7.6 J8.5 J8.6 J11.05 S3.2 S3.3 U1.6 U1.17 U1.21

## Polygon pours and split planes (outlines as drawn)
GND on Bottom Layer "GND_L02_P001" (solid, remove dead copper, pour order 1): 92.416,24.892 26.797,24.892 26.797,139.573 91.948,139.573
GND on Top Layer "GND_L01_P000" (solid, remove dead copper, pour order 0): 92.41,26.289 26.797,26.289 26.797,139.573 91.948,139.573

## Silkscreen, mask and mechanical layers (free items; w line width, h text height)
Mechanical 1:
  lines w0.254: 23.114,21.971 96.774,21.971 96.774,144.018 23.114,144.018 23.114,21.971